# Altium PCB PCB3.PcbDoc
Units mil, origin at the board's own origin, x right, y up, seen from the top; angles counter-clockwise.
Board outline 2695 x 1753.75 mil, 2 copper layers (Top Layer, Bottom Layer); 15 components, 10 nets, 53 pads, 0 vias.
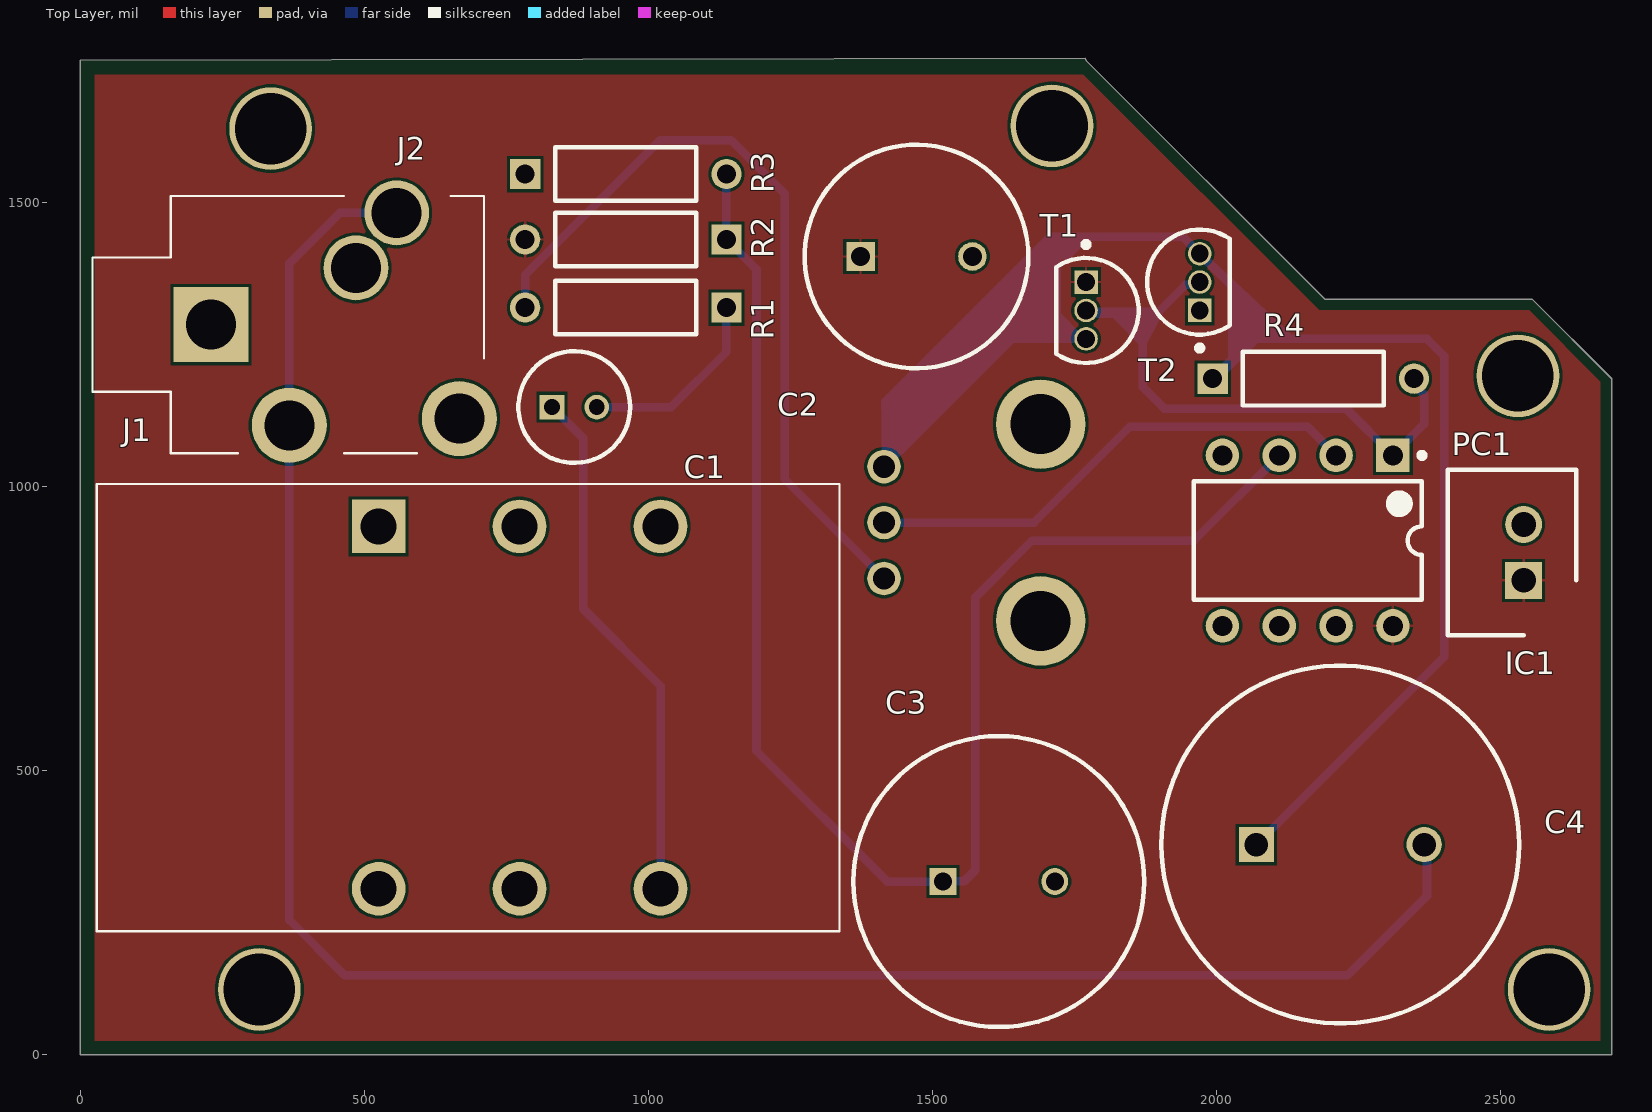
[diagram p0: Top Layer view]
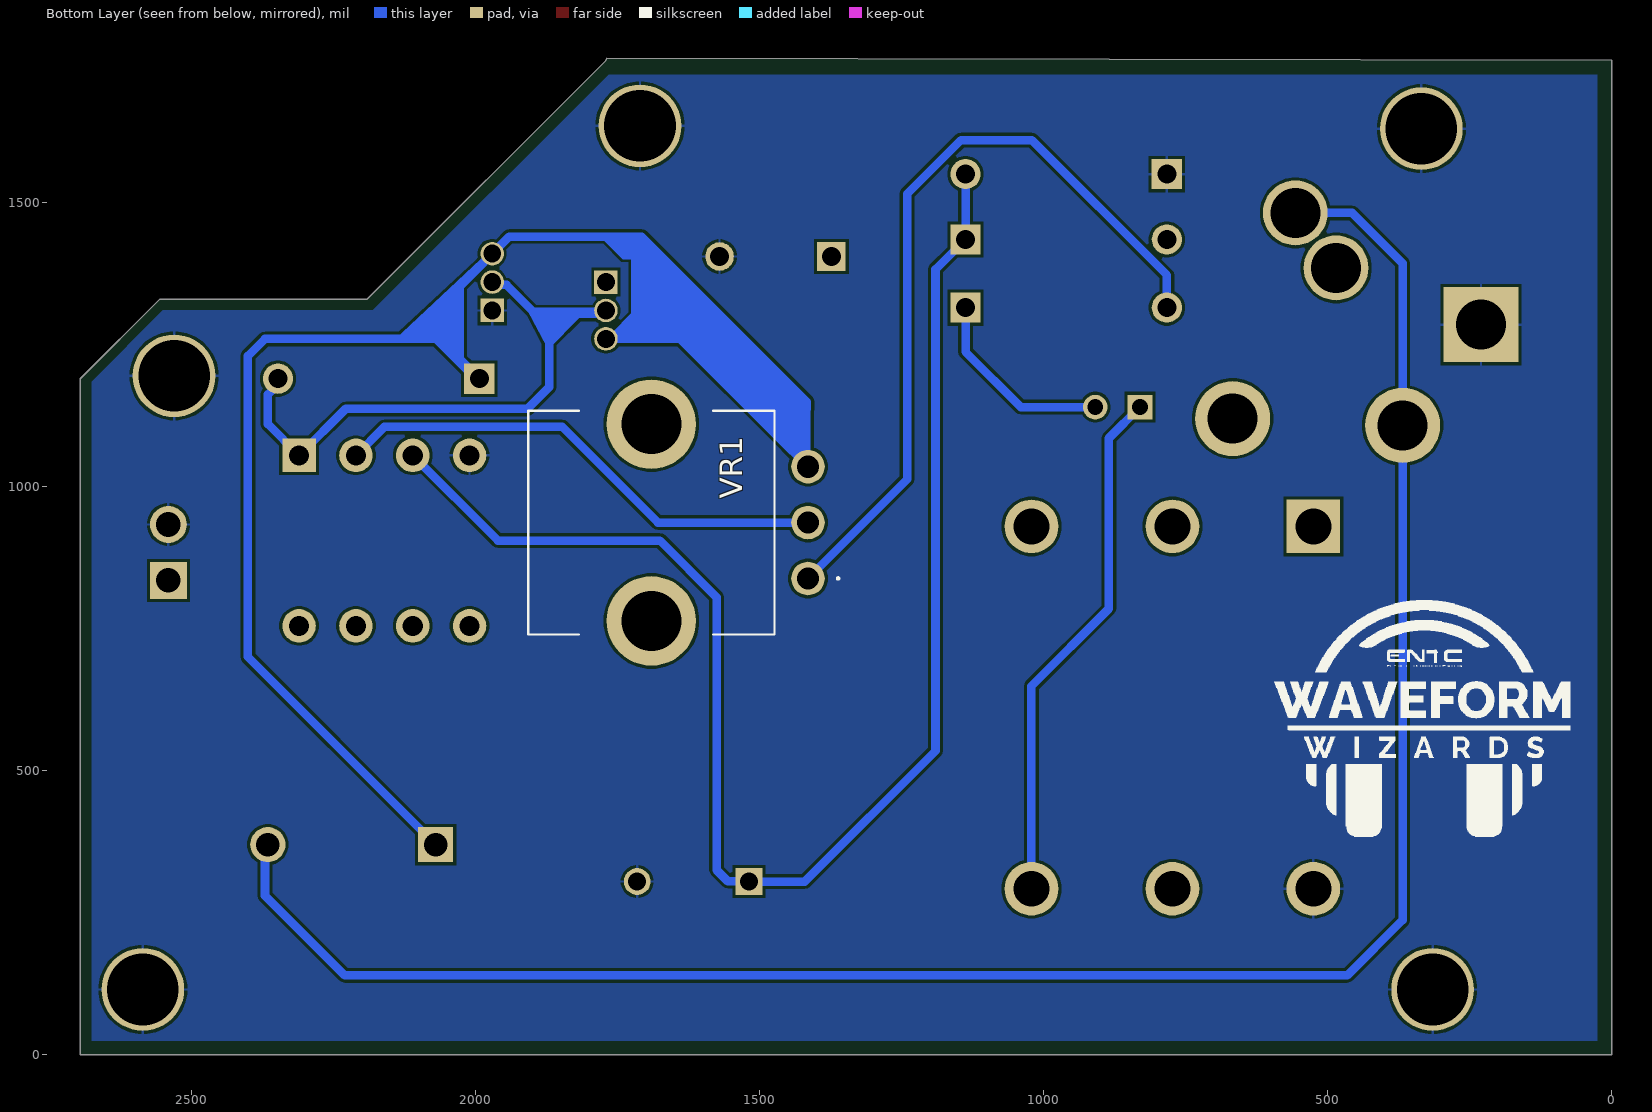
[diagram p1: Bottom Layer view, seen from below]
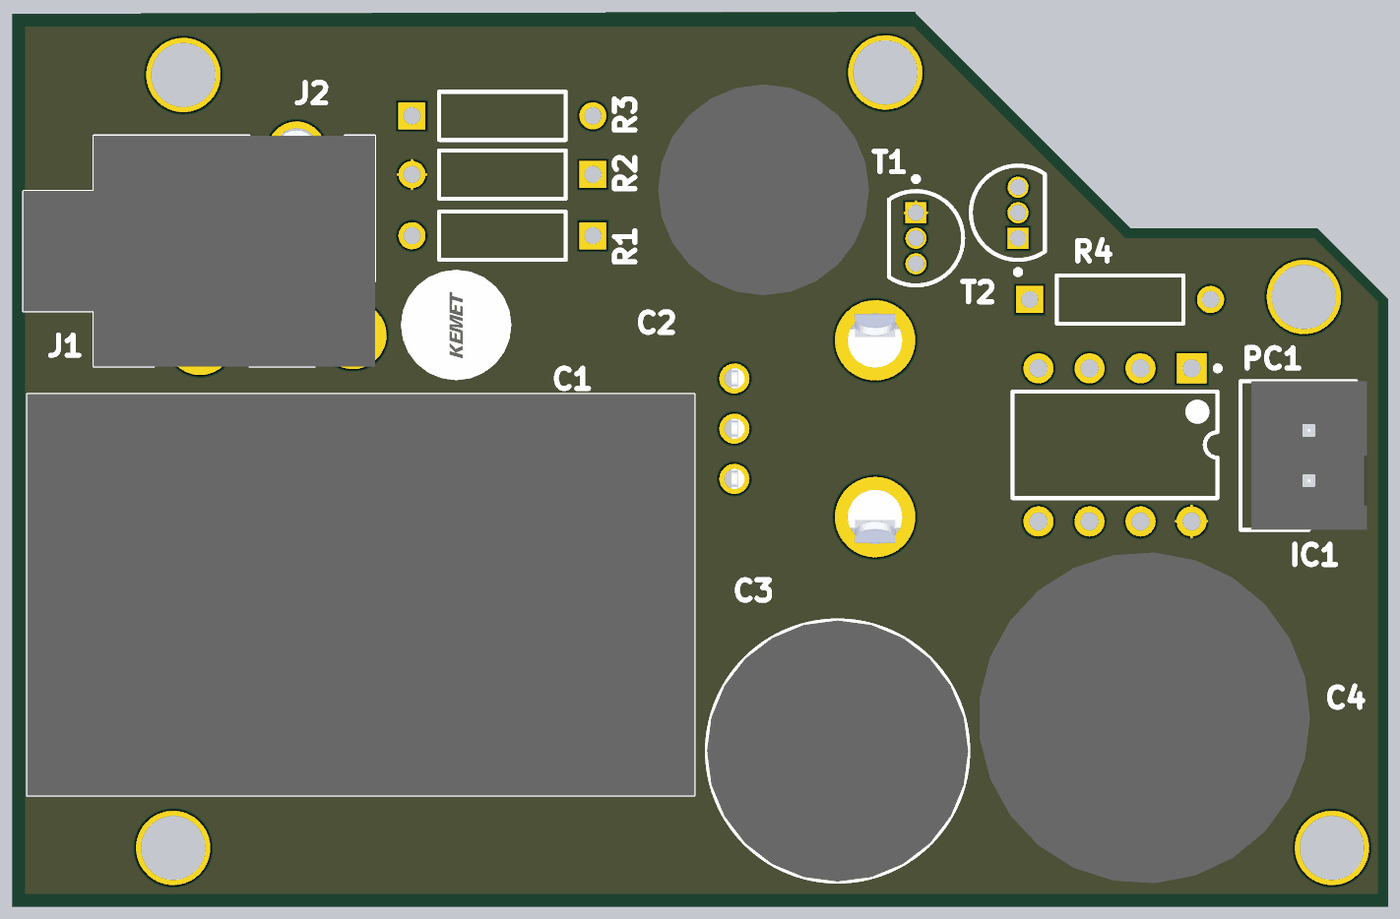
[diagram p2: 3D render of the assembled board from above, using the file's embedded part models]

## Layer stack, top to bottom
Top Solder: solder mask 0.4, Solder Resist, Dk 3.5
Top Layer: signal copper 1.4
Dielectric 1: dielectric 12.6, FR-4, Dk 4.8
Bottom Layer: signal copper 1.4
Bottom Solder: solder mask 0.4, Solder Resist, Dk 3.5

## Board outline
2200.04,1330.04 2190.04,1330.04 2190,1330 1770,1750 1768.76,1753.75 0,1750 0,0 2695,0 2695,1190 2555,1330 2200.09,1330

## Design rules (kind name [scope] priority, off if disabled: settings)
BoardOutlineClearance [All] p1: gap=7.87 ignorepadtopadclearanceinfootprint=FALSE
Clearance [All] p1: gap=5 ignorepadtopadclearanceinfootprint=FALSE except(9.84: Arc-Hole Track-Hole SMDPad-Hole THPad-Hole Via-Hole Fill-Hole Poly-Hole Region-Hole Text-Hole)
ComponentClearance [All] p1: gap=5 collisioncheckmode=3 verticalgap=5 showdistances=TRUE
DiffPairsRouting [All] p1: maxlimit=10 minlimit=5 mostfreqgap=5 toplayer_minwidth=5 toplayer_maxwidth=1000 toplayer_prefwidth=5 bottomlayer_minwidth=5 bottomlayer_maxwidth=1000 bottomlayer_prefwidth=5 maxuncoupledlength=500
Height [All] p1: minheight=0 maxheight=71497.94 prefheight=500
HoleSize [All] p1: absolutevalues=TRUE maxlimit=248.03 minlimit=11.81 maxpercent=80.000 minpercent=20.000
HoleToHoleClearance [All] p1: gap=9.84 allowstackedmicrovias=FALSE
MinimumAnnularRing [All] p1: minimumring=3
MinimumSolderMaskSliver [All] p1: minsoldermaskwidth=0
PlaneClearance [All] p1: clearance=5
PlaneConnect PlaneConnectPowerPads [InPadClass('PowerPads')] p1: planeconnectstyle=Direct reliefexpansion=20 reliefentries=4 reliefconductorwidth=10 reliefairgap=10
PlaneConnect [All] p2: pad.planeconnectstyle=Relief pad.reliefexpansion=11.81 pad.reliefentries=4 pad.reliefconductorwidth=5 pad.reliefairgap=5 via.planeconnectstyle=Direct via.reliefexpansion=11.81 via.reliefentries=4 via.reliefconductorwidth=5 via.reliefairgap=5
PolygonConnect PolygonConnectPowerPads [All vs (InPadClass('PowerPads'))] p1: connectstyle=Direct reliefconductorwidth=10 reliefentries=4 polygonreliefangle="90 Angle" airgapwidth=10
PolygonConnect [All] p2: thpad.connectstyle=Relief thpad.reliefconductorwidth=5 thpad.reliefentries=4 thpad.polygonreliefangle="90 Angle" thpad.airgapwidth=5 smdpad.connectstyle=Relief smdpad.reliefconductorwidth=5 smdpad.reliefentries=4 smdpad.polygonreliefangle="90 Angle" smdpad.airgapwidth=5 via.connectstyle=Direct via.reliefconductorwidth=5 via.reliefentries=4 via.polygonreliefangle="90 Angle" via.airgapwidth=5
RoutingVias [All] p1: holewidth=11.81 width=23.62 viastyle="Through Hole" minholewidth=11.81 minwidth=23.62 maxholewidth=23.62 maxwidth=259.84
SilkToSilkClearance [All] p1: silktosilkclearance=0
SilkToSolderMaskClearance [IsPad] p1: minsilkscreentomaskgap=5 clearancetoexposedcopper=TRUE
SolderMaskExpansion [All] p1: expansion=2.95 istentingtop=FALSE
Width [All] p1: maxlimit=1000 minlimit=5 preferedwidth=5 minimp=50.000000 maximp=50.000000 favimp=50.000000
20 further rules are at their usual default settings.

## Components (designator, comment, footprint, x,y, rotation, side; value= is the part's Value field where it differs from the comment)
C1 "2.2uF" CAPPRD200W50D500H1250 830,1140 r0 top
C2 "470uF" CAPPRD500W65D1000H1700 1373.15,1405 r0 top
C3 "47uF" CAPPRD500W60D1300H2200 1518.15,305 r0 top
C4 "1000uF" CAPPRD750W85D1600H2200 2069.72,370 r0 top
IC1 "NE5532P" P0008A 2160,905 r270 top
J1 "4833.2330" 48332330 525,930 r270 top
J2 "SJ1-3515N" SJ13515N 230,1285 r0 top
PC1 "B2B-XH-A" SHDR2W64P0X250_1X2_740X575X700P 2540,835 r90 top
R1 "10k" RESA60-630X240 960,1315 r180 top
R2 "10k" RESA60-630X240 960,1435 r180 top
R3 "10k" RESA60-630X240 960,1550 r0 top
R4 "560" RESA60-630X240 2170,1190 r0 top
T1 "BC547B" ONSC-TO-92-3-29-11 1770,1310 r270 top
T2 "BC557BG" ONSC-TO-92-3-29-11 1970,1360 r90 top
VR1 "PTV09A-4020F-A504" PTV09A4020FA504 1414.41,838.35 r90 bottom

## Footprints (in the part's own frame and the unit in brackets; to place one, negate y for a bottom-side part, rotate by r counter-clockwise, add the part's x,y. Pads: shape width x height; smd on the part's side, far side on the other; paste and mask are expansions set on the pad)
48332330 [mm]
  rect 2.4x2.4 hole 1.6: F1(0,0)
  round 2.4 hole 1.6: F2(0,6.3) F3(0,12.6) S1(16.2,0) S2(16.2,6.3) S3(16.2,12.6)
  silkscreen extent -1.9,-12.6 18.1,20.6, body extent -1.9,-12.6 18.1,20.6, height 15.6
CAPPRD200W50D500H1250 [mm]
  rect 1.1x1.1 hole 0.7: 1(0,0)
  round 1.1 hole 0.7: 2(2,0)
  silkscreen extent -1.5,-2.5 3.5,2.5, body extent -1.73,-2.75 3.73,2.75, height 12.5
CAPPRD500W60D1300H2200 [mm]
  rect 1.2x1.2 hole 0.8: 1(0,0)
  round 1.2 hole 0.8: 2(5,0)
  silkscreen extent -4,-6.5 9,6.5, body extent -3.99,-6.5 9,6.5, height 22
CAPPRD500W65D1000H1700 [mm]
  rect 1.275x1.275 hole 0.85: 1(0,0)
  round 1.275 hole 0.85: 2(5,0)
  silkscreen extent -2.5,-5 7.5,5, body extent -2.75,-5.24 7.75,5.24, height 17
CAPPRD750W85D1600H2200 [mm]
  rect 1.575x1.575 hole 1.05: 1(0,0)
  round 1.575 hole 1.05: 2(7.5,0)
  silkscreen extent -4.25,-8 11.75,8, body extent -4.5,-8.24 12,8.24, height 22
ONSC-TO-92-3-29-11 [mm] "TO, 3-Leads, Body Dia 4.7mm, Pitch 1.27mm"
  rect 1.05x1.05 hole 0.8: 1(-1.27,0)
  round 1.05 hole 0.8: 2(0,0) 3(1.27,0)
  silkscreen extent -3.07,-1.34 2.35,2.35, body extent -2.35,-1.33 2.36,2.36, height 7.87
P0008A [mm] "DIP, 8-Leads, Body 10.15x6.6mm, Pitch 2.54mm"
  rect 1.5x1.5 hole 0.9: 1(-3.81,3.81)
  round 1.5 hole 0.9: 2(-3.81,1.27) 3(-3.81,-1.27) 4(-3.81,-3.81) 5(3.81,-3.81) 6(3.81,-1.27) 7(3.81,1.27) 8(3.81,3.81)
  silkscreen extent -3.93,-5.1 2.65,5.24, body extent -3.95,-5.07 3.95,5.07, height 5.08
PTV09A4020FA504 [mm]
  round 1.5 hole 1: 1(0,0) 2(2.5,0) 3(5,0)
  round 4 hole 2.69: MH1(-1.9,7) MH2(6.9,7)
  silkscreen extent -2.5,-1.4 7.5,12.5, body extent -3.19,-0.15 8.21,12.5, height 19.88
RESA60-630X240 [mm] "Axial Resistor, 2-Leads, Dia 2.4mm, Body Length 6.3mm"
  rect 1.35x1.35 hole 0.85: 1(-4.5,0)
  round 1.35 hole 0.85: 2(4.5,0)
  silkscreen extent -3.15,-1.2 3.15,1.2, body extent -3.15,-1.2 3.15,1.2, height 2.4
SHDR2W64P0X250_1X2_740X575X700P [mm]
  rect 1.65x1.65 hole 1.1: 1(0,0)
  round 1.65 hole 1.1: 2(2.5,0)
  silkscreen extent -2.45,-2.35 4.95,3.4, body extent -2.45,-2.88 4.95,2.88, height 7
SJ13515N [mm]
  rect 3.354x3.354 hole 2.236: 1(0,0)
  round 3.354 hole 2.236: 2(3.5,-4.5) 4(11.1,-4.2)
  round 2.9 hole 2.236: 3(8.3,5) 5(6.477,2.54)
  silkscreen extent -5.3,-5.75 12.2,5.75, body extent -5.3,-5.75 12.2,6.01, height 6.1

## Part data
C1: library part ESK225M050AC3KA, "Capacitor Polarised", Manufacturer_Name=KEMET, Mouser Part Number=80-ESK225M050AC3KA, Datasheet Link=https://content.kemet.com/datasheets/KEM_A4004_ESK.pdf, Height=12.5mm, Manufacturer_Part_Number=ESK225M050AC3KA, Mouser Price/Stock=https://www.mouser.com/Search/Refine.aspx?Keyword=80-ESK225M050AC3KA
C2: library part ECA-1VM471B, "Capacitor Polarised", Manufacturer_Name=Panasonic, Mouser Part Number=667-ECA-1VM471B, Arrow Part Number=ECA-1VM471B, Arrow Price/Stock=https://www.arrow.com/en/products/eca-1vm471b/panasonic?region=nac, Datasheet Link=http://industrial.panasonic.com/cdbs/www-data/pdf/RDF0000/ABA0000C1218.pdf, Height=17mm, Manufacturer_Part_Number=ECA-1VM471B, Mouser Price/Stock=https://www.mouser.co.uk/ProductDetail/Panasonic/ECA-1VM471B?qs=HDhZcL5REiYtj3pihfsTHg%3D%3D
C3: library part UCS2E470MHD1TO, "Capacitor Polarised", Manufacturer_Name=Nichicon, Mouser Part Number=647-UCS2E470MHD1TO, Arrow Part Number=UCS2E470MHD1TO, Arrow Price/Stock=https://www.arrow.com/en/products/ucs2e470mhd1to/nichicon, Datasheet Link=http://www.nichicon.co.jp/english/products/pdfs/e-ucs.pdf, Height=22mm, Manufacturer_Part_Number=UCS2E470MHD1TO, Mouser Price/Stock=https://www.mouser.com/Search/Refine.aspx?Keyword=647-UCS2E470MHD1TO
C4: library part EEU-FC1V102S, "Capacitor Polarised", Manufacturer_Name=Panasonic, Mouser Part Number=667-EEU-FC1V102S, Arrow Part Number=EEU-FC1V102S, Arrow Price/Stock=https://www.arrow.com/en/products/eeu-fc1v102s/panasonic?region=nac, Datasheet Link=http://industrial.panasonic.com/cdbs/www-data/pdf/RDF0000/ABA0000C1209.pdf, Height=22mm, Manufacturer_Part_Number=EEU-FC1V102S, Mouser Price/Stock=https://www.mouser.co.uk/ProductDetail/Panasonic/EEU-FC1V102S?qs=NFmy3EUjRuVoETF2mRqKyQ%3D%3D
IC1: library part CMP-0017-00910-2, "Dual Low-Noise High-Speed Audio Operational Amplifier, 10 to 30 V, 0 to 70 degC, 8-pin DIP (P8), Pb-Free (RoHS)", Manufacturer="Texas Instruments", Total Supply Voltage(Max)(+5V is 5, +/-5V is 10)=30, Total Supply Voltage(Min)(+5V is 5, +/-5V is 10)=10, CMRR(Min)(dB)=70, Code_JEDEC=MS-001, ComponentLink1Description="Manufacturer URL", ComponentLink1URL=http://www.ti.com/, ComponentLink2Description=Datasheet, ComponentLink2URL=http://www.ti.com/lit/ds/symlink/ne5532.pdf, ComponentLink3Description="Package Specification", ComponentLink3URL=http://www.ti.com/litv/pdf/mpdi001b, DatasheetVersion=SLOS075I, Eco-Plan="Pb-Free (RoHS)", GBW(Typ)(MHz)=10, IIB(Max)(pA)=800000, Iq per channel(Max)(mA)=4, Mounting Technology="Through Hole", Number of Channels=2, PackageDescription="8-Pin Plastic In-Line, Body 9.59 x 6.35 mm, Pitch 2.54 mm", PackageReference=P0008A, PackageVersion="4040082/E, 04/2010", PartNumber=NE5532P, Slew Rate(Typ)(V/us)=9, Sub Family="General Purpose Amplifier, High Supply Voltage Amplifier (>=30V), Low Noise Amp (<=10nV/rtHz)", Vio (25C)(Max)(mV)=4, Vn at 1kHz(Typ)(nV/rtHz)=5
J1: "Connector", Manufacturer_Name=SCHURTER, Mouser Part Number=693-4833.233, Datasheet Link=https://4donline.ihs.com/images/VipMasterIC/IC/SHRI/SHRIS26499/SHRIS26511-1.pdf?hkey=52A5661711E402568146F3353EA87419, Height=15.5mm, Manufacturer_Part_Number=4833.2330, Mouser Price/Stock=https://www.mouser.co.uk/ProductDetail/Schurter/4833.2330?qs=wwP%252BWDYHj0Z3fNxHdwSLYg%3D%3D
J2: "Connector", Manufacturer_Name="CUI Devices", Mouser Part Number=490-SJ1-3515N, Arrow Part Number=SJ1-3515N, Arrow Price/Stock=https://www.arrow.com/en/products/sj1-3515n/cui-devices?region=nac, Datasheet Link=https://componentsearchengine.com/Datasheets/1/SJ1-3515N.pdf, Height=6mm, Manufacturer_Part_Number=SJ1-3515N, Mouser Price/Stock=https://www.mouser.co.uk/ProductDetail/CUI-Devices/SJ1-3515N?qs=WyjlAZoYn51jeVVXLxifpg%3D%3D
PC1: "Connector", Manufacturer_Name="JST (JAPAN SOLDERLESS TERMINALS)", Datasheet Link=https://order.jst-mfg.com/InternetShop/app/pdf_show.php?kbn=3&key=XH%20CONNECTOR%20THROUGH-HOLE%20TYPE%20SHROUDED%20HEADER.pdf, Height=7mm, Manufacturer_Part_Number=B2B-XH-A
R1 R2 R3 R4: library part CMP-1659-00074-2, "Axial Resistor, 10 KOhm, +/- 1%, 0.25 W, -55 to 155 degC, 2-Pin THD, RoHS, Bulk", Case\/Package=Axial, Manufacturer=Yageo, Max Operating Temperature=155degC, Max Power Dissipation=250mW, Min Operating Temperature=-55degC, Package Description="2-Pin Axial Lead, Dia 2.4 mm, Body Length 6.3 mm", Package Quantity=200, Package Reference=MFR-25, Resistance=10KOhm, Temperature Coefficient=100ppm\/degreesC, Tolerance=1%, Voltage Rating=250V, Voltage Rating (DC)=200V, Composition=MetalFilm, Datasheet URL=http://www.yageo.com/documents/recent/Yageo%20LR_MFR_2013.pdf, Datasheet Version=04/2013, Lead Free=LeadFree, Length=0.248inch, Manufacturer URL=http://www.yageo.com/, Military Standard=Not, Mount=ThroughHole, Mounting Technology=ThroughHole, Number of Terminations=2, Packaging=Bulk, Power Rating=250mW, RoHSCompliant=True, Termination=Axial
T1: library part CMP-1048-01467-1, "Amplifier Transistor, NPN Silicon, 3-Pin TO-92, Bulk Box", Manufacturer="On Semiconductor", ComponentLink1Description="Manufacturer URL", ComponentLink1URL=http://www.onsemi.com/, ComponentLink2Description=Datasheet, ComponentLink2URL=http://www.onsemi.com/pub_link/Collateral/BC546-D.PDF, ComponentLink3Description="Package Specification", ComponentLink3URL=http://www.onsemi.cn/pub_link/Collateral/2N6426-D.PDF, DatasheetVersion="Rev. 7", fT Min (MHz)=150, IC Continuous (A)=0.1, Mounting Technology="Through Hole", PackageDescription="3-Pin Transistor Outline, Body 4.825 x 3.685 mm, Pitch 1.27 mm", PackageReference=TO-92-3-29-11_AM_SL, PackageVersion="Rev. AM", Packing="Bulk Box", PartNumber=BC547B, Polarity=NPN, RoHS=FALSE
T2: library part CMP-1048-01440-1, "Amplifier Transistor, PNP Silicon, 3-Pin TO-92, Pb-Free, Bulk Box", Manufacturer="On Semiconductor", ComponentLink1Description="Manufacturer URL", ComponentLink1URL=http://www.onsemi.com/, ComponentLink2Description=Datasheet, ComponentLink2URL=http://www.onsemi.com/pub_link/Collateral/BC556B-D.PDF, ComponentLink3Description="Package Specification", ComponentLink3URL=http://www.onsemi.cn/pub_link/Collateral/2N6426-D.PDF, DatasheetVersion="Rev. 3", IC Continuous (A)=-0.1, Mounting Technology="Through Hole", PackageDescription="3-Pin Transistor Outline, Body 4.825 x 3.685 mm, Pitch 1.27 mm", PackageReference=TO-92-3-29-11_AM_SL, PackageVersion="Rev. AM", Packing="Bulk Box", PartNumber=BC557BG, Polarity=PNP, RoHS=TRUE
VR1: "Variable Resistor", Manufacturer_Name=Bourns, Mouser Part Number=652-PTV09A-4020FA504, Arrow Part Number=PTV09A-4020F-A504, Arrow Price/Stock=https://www.arrow.com/en/products/ptv09a-4020f-a504/bourns?region=nac, Datasheet Link=https://datasheet.datasheetarchive.com/originals/distributors/SFDatasheet-7/sf-000140356.pdf, Height=20mm, Manufacturer_Part_Number=PTV09A-4020F-A504, Mouser Price/Stock=https://www.mouser.co.uk/ProductDetail/Bourns/PTV09A-4020F-A504?qs=Qzws7J6gxqz8dpZEeJ%2FXBw%3D%3D

## Free pads (board coordinates)
  round 145.67 hole 125.98: 2(315,115) 3(2585,115) 4(2530,1195) 5(335,1630) 6(1710,1635)

## Nets (pads, with @x,y where several pads share a name; then routed paths per layer and width w, separated by ;. In a path a pad name is that pad's centre, name@x,y a point inside that pad or via, vN(x,y) a via of type N, cw(c..) or ccw(c..) an arc to the next point about the centre after c; other vN are vias at no path point)
GND: C2.2 C3.2 IC1.4 J1.S1 J2.1 pad.2 pad.3 pad.4 pad.5 pad.6 PC1.2 R3.1 T2.1
IN: C1.1 J1.S3 | length 937.5
  Bottom Layer w15: C1.1 885,1085 885,785 1021.06,648.94 J1.S3@1021.06,281.61
NetC1_2: C1.2 R1.1 | length 346.5
  Bottom Layer w15: C1.2 1040,1140 1137.17,1237.17 R1.1
NetC3_1: C3.1 IC1.3 R2.1 R3.2 | length 2644
  Bottom Layer w15: R3.2 R2.1 1190,1382.17 1190,535 1420,305 C3.1 1518.63,305.48 1555.48,305.48 1575,325 1575,805 1675,905 1960,905 IC1.3
OUT: C4.2 J2.2 J2.3 | length 3561.8
  Bottom Layer w15: J2.2 367.8,1392.8 456.85,1481.85 J2.3 ; J2.2@367.95,1107.83 367.95,237.05 465,140 2230,140 2370,280 C4.2@2370,360
V1: R1.2 VR1.1 | length 1401.1
  Bottom Layer w15: R1.2 782.83,1372.17 1020.67,1610 1145,1610 1240,1515 1240,1012.76 VR1.1
V2: C4.1 R4.1 T1.3 T2.3 VR1.3 | length 2868.7
  Bottom Layer w15: VR1.3 1465.98,1086.77 ; T1.3@1772.5,1257.5 T1.3 1639.21,1260 1465.98,1086.77 ; R4.1 2030,1227.17 2030,1242.17 ; C4.1 2400,700.28 2400,1230 2370,1260 2061.89,1260 2055,1260.03 2047.86,1260.03 2030,1242.17 ; 1465.98,1086.77 1416.21,1136.54 1416.21,1148.96 1707.25,1440 1940,1440 2030,1350 2030,1242.17
VCC: C2.1 IC1.8 PC1.1 R2.2 T1.1
VOUT: IC1.1 R4.2 T1.2 T2.2 | length 1010.2
  Bottom Layer w15: T1.2 1772.5,1307.5 1870,1307.5 ; T2.2 1964.96,1354.96 1944.96,1354.96 1897.5,1307.5 1870,1307.5 ; R4.2 2347.17,1179.97 2365,1162.14 2365,1110 IC1.1 2227.97,1137.03 1907.97,1137.03 1870,1175 1870,1307.5
VR_IN: IC1.2 VR1.2 | length 886
  Bottom Layer w15: VR1.2 1678.49,936.77 1846.72,1105 2160,1105 IC1.2
pads on no net: IC1.5 IC1.6 IC1.7 J1.F1 J1.F2 J1.F3 J1.S2 J2.4 J2.5 VR1.MH1 VR1.MH2

## Polygon pours and split planes (outlines as drawn)
VCC on Top Layer "VCC_L01_P003" (solid, pour order 3): 25,1725 1765,1725 2180,1310 2550,1310 2675,1185 2675,25 2670,25 25,25
GND on Bottom Layer "GND_L02_P004" (solid, pour order 4): 25,1725 1765,1725 2180,1310 2550,1310 2675,1185 2675,25 25,25

## Other copper
Bottom Layer:
  region net V2: 1990,1400 2141.32,1258.84 2077.72,1258.84 2020.08,1201.2 2020.08,1360
  region net VOUT: 1775.62,1303.12 1910,1315 1871.87,1241.87 1816.88,1296.88 1781.88,1296.88
  region net V2: 1410,1150 1410,1030.79 1639.21,1260 1760,1260 1760,1270 1725,1305 1725,1400 1740,1400 1780,1440 1700,1440 1650,1390

## Silkscreen, mask and mechanical layers (free items; w line width, h text height)
Bottom Overlay:
  drawing of 57 lines, arcs and shapes, not listed
Mechanical 13:
  lines w10: 5,5 5,1750 1765,1750 2190,1325 2555,1325 2690,1190 2690,5 5,5